# Altium PCB BLDC_PCB_V2.1.PcbDoc
Units mm, origin at the board's own origin, x right, y up, seen from the top; angles counter-clockwise.
Board outline 105 x 68 mm, 2 copper layers (Top Layer, Bottom Layer); 58 components, 33 nets, 138 pads, 16 vias.
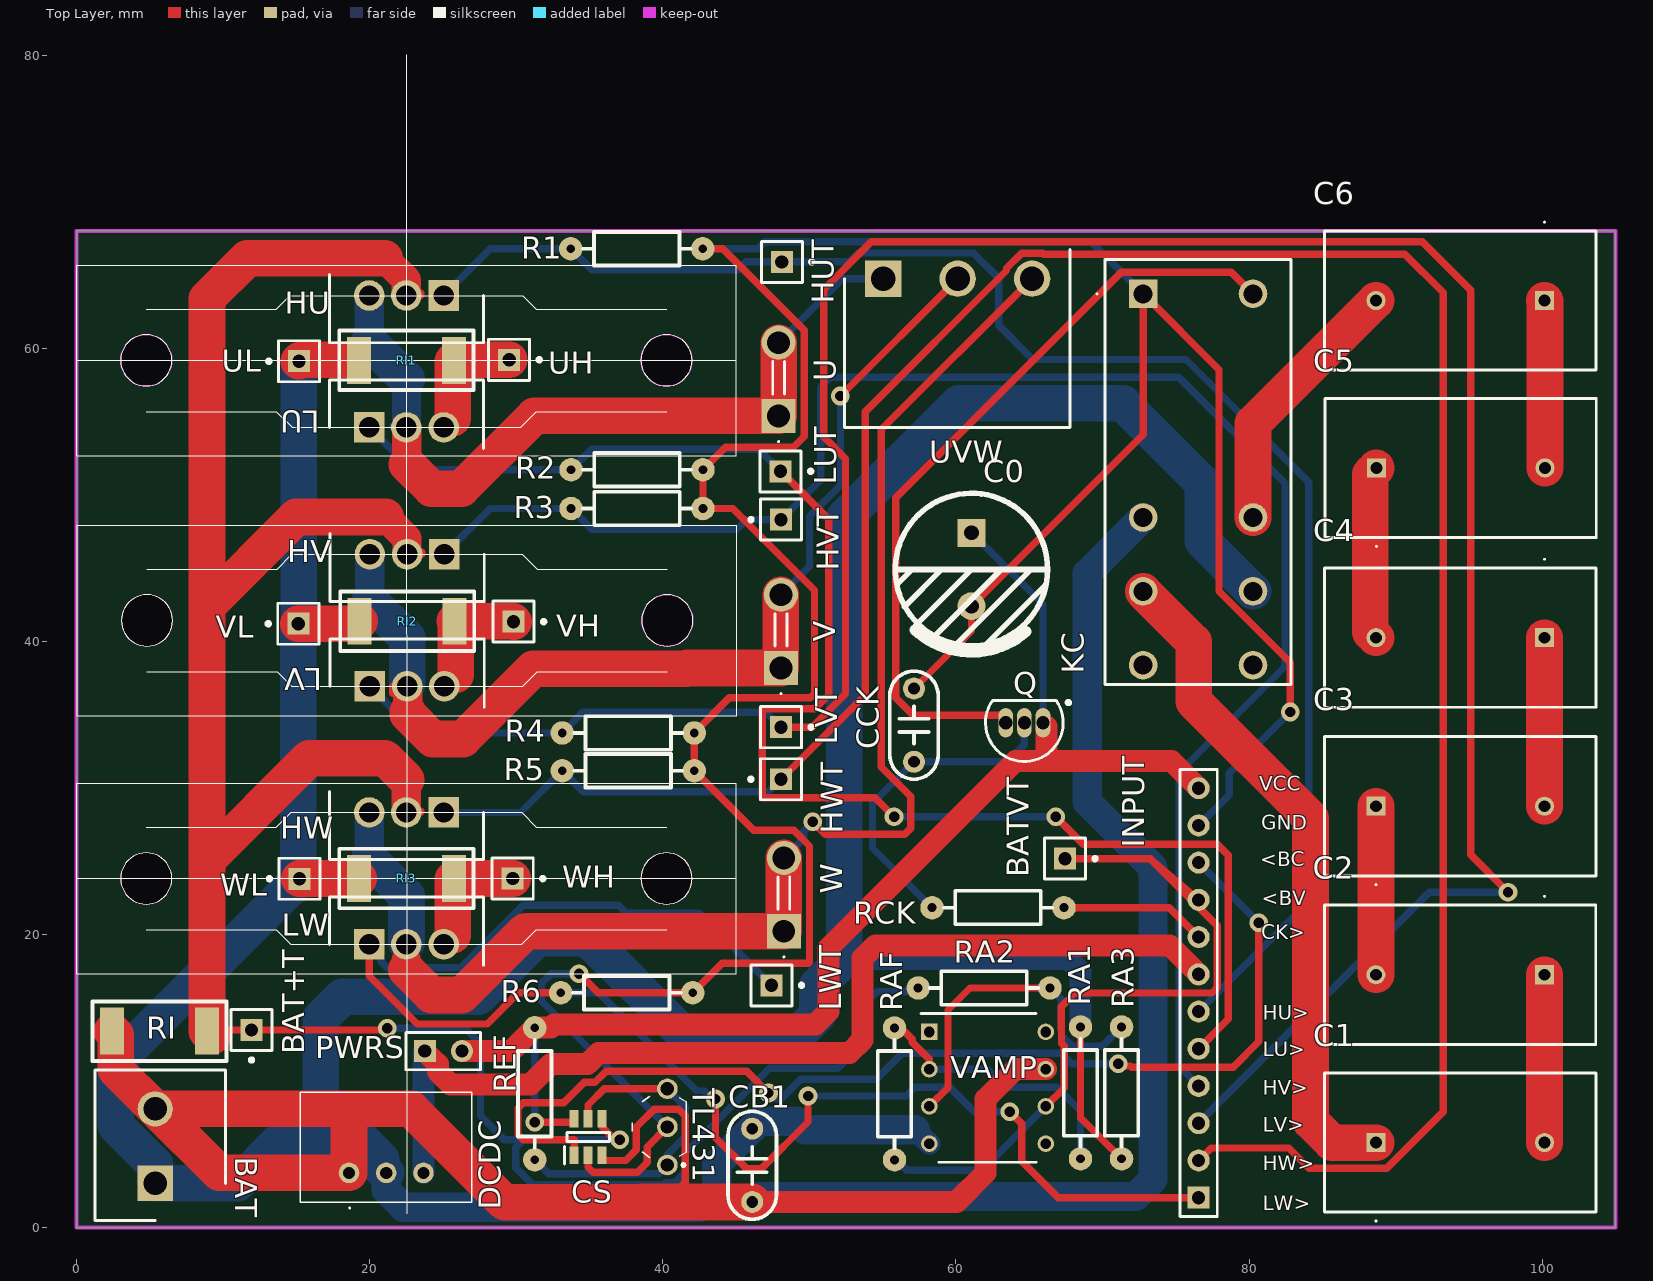
[diagram p0: Top Layer view]
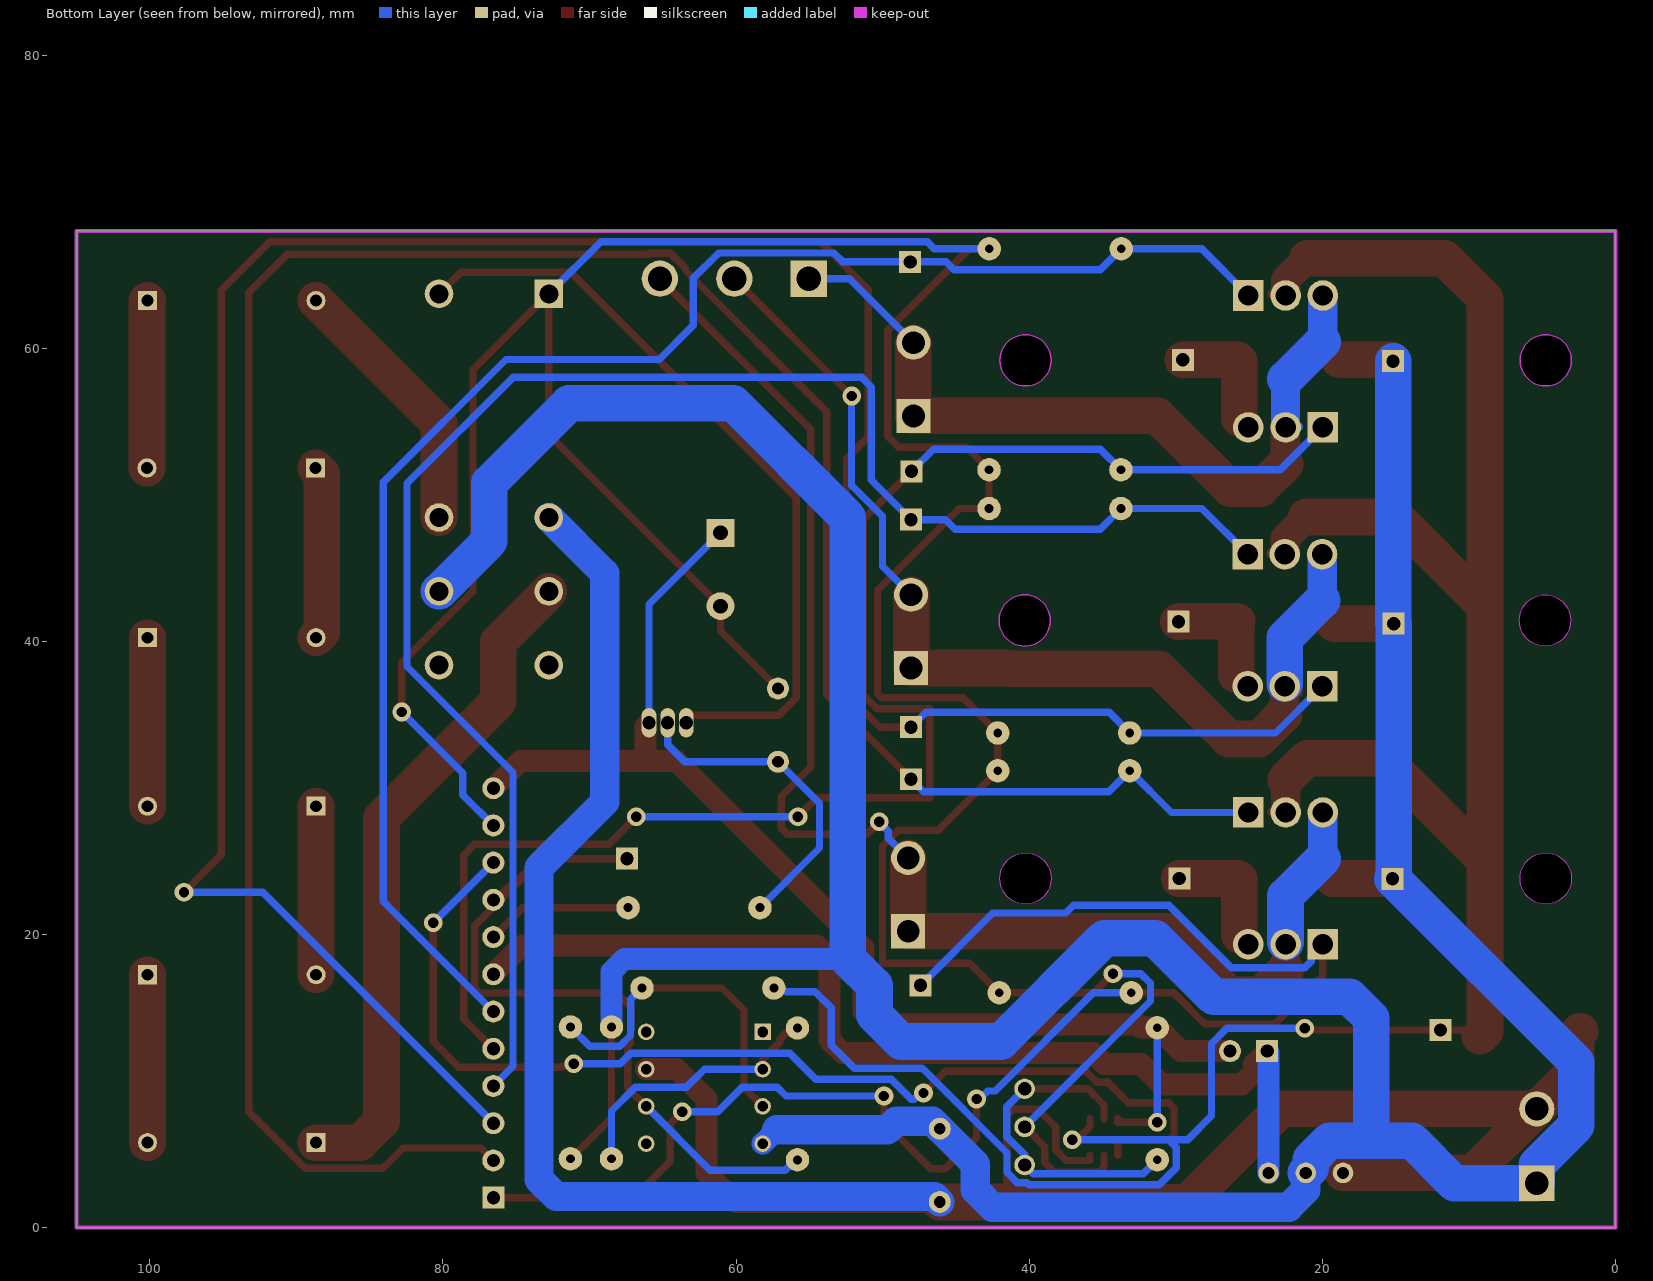
[diagram p1: Bottom Layer view, seen from below]
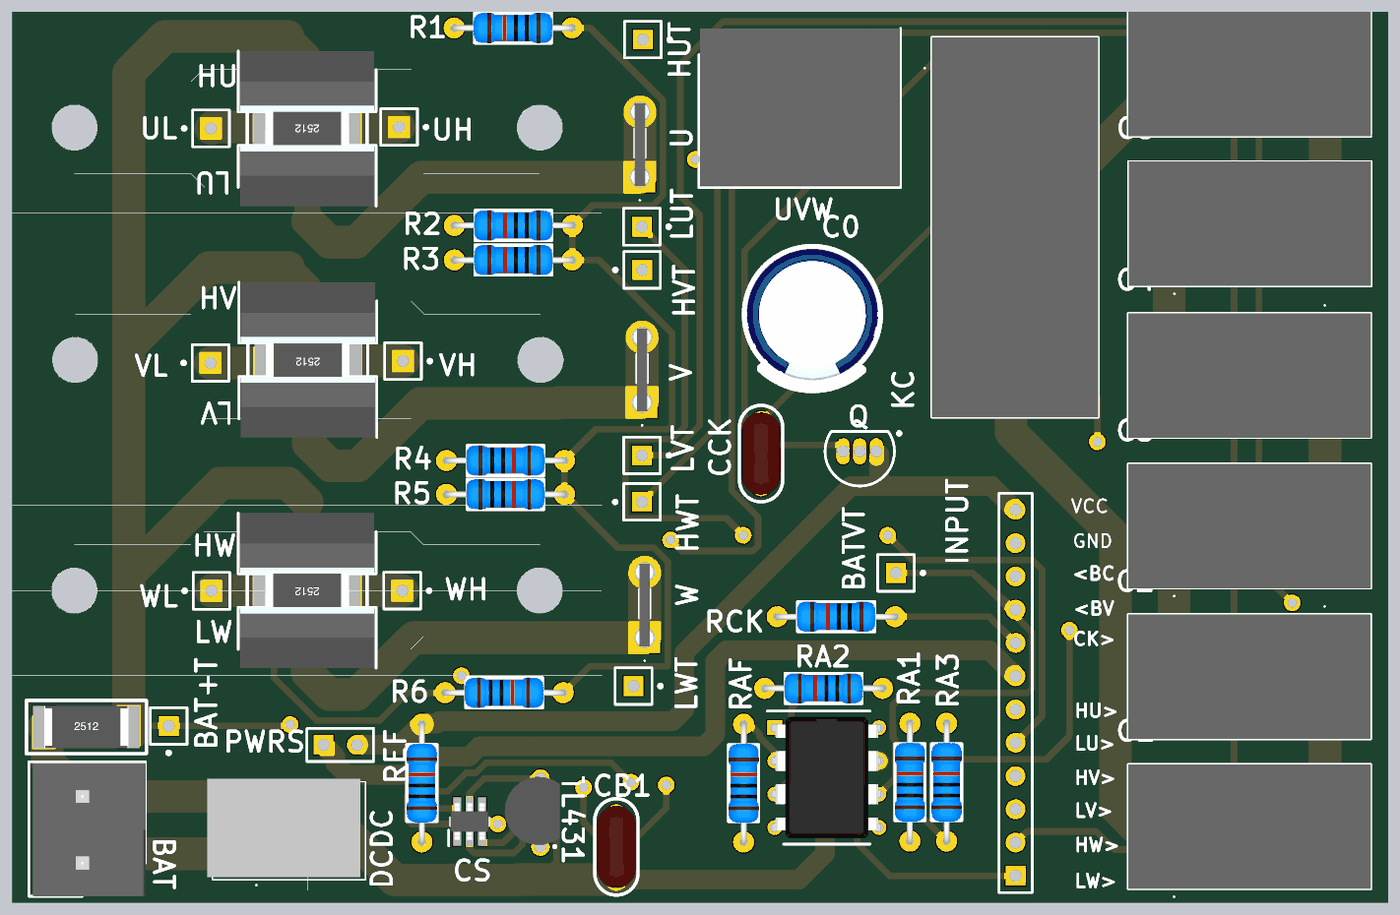
[diagram p2: 3D render of the assembled board from above, using the file's embedded part models]

## Layer stack, top to bottom
Top Solder: solder mask 0.0102, Solder Resist, Dk 3.5
Top Layer: signal copper 0.0356
Dielectric 1: dielectric 0.32, FR-4, Dk 4.8
Bottom Layer: signal copper 0.0356
Bottom Solder: solder mask 0.0102, Solder Resist, Dk 3.5

## Board outline
0,0 0,68 105,68 105,0
cut-out: 4.756,25.569 ccw(c4.756,23.819) 3.006,23.819 ccw(c4.756,23.819) 4.756,22.069 ccw(c4.756,23.819) 6.506,23.819 ccw(c4.756,23.819)
cut-out: 38.506,59.172 cw(c40.256,59.172) 40.256,60.922 cw(c40.256,59.172) 42.006,59.172 cw(c40.256,59.172) 40.256,57.422 cw(c40.256,59.172)
cut-out: 38.556,41.429 cw(c40.306,41.429) 40.306,43.179 cw(c40.306,41.429) 42.056,41.429 cw(c40.306,41.429) 40.306,39.679 cw(c40.306,41.429)
cut-out: 40.256,25.569 ccw(c40.256,23.819) 38.506,23.819 ccw(c40.256,23.819) 40.256,22.069 ccw(c40.256,23.819) 42.006,23.819 ccw(c40.256,23.819)
cut-out: 3.006,59.172 cw(c4.756,59.172) 4.756,60.922 cw(c4.756,59.172) 6.506,59.172 cw(c4.756,59.172) 4.756,57.422 cw(c4.756,59.172)
cut-out: 4.806,43.179 ccw(c4.806,41.429) 3.056,41.429 ccw(c4.806,41.429) 4.806,39.679 ccw(c4.806,41.429) 6.556,41.429 ccw(c4.806,41.429)

## Design rules (kind name [scope] priority, off if disabled: settings)
Clearance [All] p1: gap=0.25 ignorepadtopadclearanceinfootprint=FALSE
PolygonConnect [All] p1: connectstyle=Relief reliefconductorwidth=0.254 reliefentries=4 polygonreliefangle="90 Angle" airgapwidth=0.254
RoutingVias [All] p1: holewidth=0.711 width=1.27 viastyle="Through Hole" minholewidth=0.711 minwidth=1.27 maxholewidth=0.711 maxwidth=1.27
SolderMaskExpansion [All] p1: expansion=0.102 istentingtop=FALSE
Width [All] p1: maxlimit=5 minlimit=0.3 preferedwidth=0.5
30 further rules are at their usual default settings.

## Components (designator, comment, footprint, x,y, rotation, side; value= is the part's Value field where it differs from the comment)
BAT "1757242" SHDR2W100P0X508_1X2_1016X860X1250P 5.37,3.02 r90 top
BAT+T "Test" PIN1 11.94,13.48 r180 top
BATVT "Test" PIN1 67.44,25.17 r270 top
C0 "Cap Pol1" "CAP 5.0*10*12.5" 61.06,44.9 r270 top value=100pF
C1 "SCMR22H155PSBB0" SCMR22H155PSBB0 88.66,5.8 r90 top
C2 "SCMR22H155PSBB0" SCMR22H155PSBB0 100.156,17.25 r270 top
C3 "SCMR22H155PSBB0" SCMR22H155PSBB0 88.66,28.75 r90 top
C4 "SCMR22H155PSBB0" SCMR22H155PSBB0 100.16,40.25 r270 top
C5 "SCMR22H155PSBB0" SCMR22H155PSBB0 88.69,51.83 r90 top
C6 "SCMR22H155PSBB0" SCMR22H155PSBB0 100.16,63.25 r270 top
CB1 "Cap" "CBB 6.3*6.3*5" 46.1,4.25 r90 top value=47UF
CCK "Cap" "CBB 6.3*6.3*5" 57.14,34.28 r90 top value=100pF
CS "INA181A4QDBVRQ1" SOT95P280X145-6N 34.9,6.18 r90 top
DCDC "TSR_1-2450E" TSR12450E 18.59,3.73 r0 top
HU "IRL530" TO254P465X1024X2050-3P 25.046,63.595 r180 top
HUT "Test" PIN1 48.12,65.89 r270 top
HV "IRL530" TO254P465X1024X2050-3P 25.096,45.935 r180 top
HVT "Test" PIN1 48.07,48.3 r90 top
HW "IRL530" TO254P465X1024X2050-3P 25.046,28.325 r180 top
HWT "Test" PIN1 48.06,30.59 r90 top
INPUT "Header 12" HDR1X12 76.56,2.04 r90 top
KC "Relay-DPDT" RT424012613932433 72.77,63.71 r270 top
LU "IRL530" TO254P465X1024X2050-3P 19.966,54.595 r0 top
LUT "Test" PIN1 48.04,51.6 r270 top
LV "IRL530" TO254P465X1024X2050-3P 20.016,36.935 r0 top
LVT "Test" PIN1 48.06,34.14 r270 top
LW "IRL530" TO254P465X1024X2050-3P 19.966,19.325 r0 top
LWT "Test" PIN1 47.41,16.53 r270 top
PWRS "Header 2" HDR1X2 23.76,12.04 r0 top
Q "NPN" TO-226-AA 64.67,34.45 r90 top
R1 "Res2" "RS 1/4W" 38.22,66.78 r180 top value=2.2K
R2 "Res2" "RS 1/4W" 38.24,51.7 r180 top value=2.2K
R3 "Res2" "RS 1/4W" 38.24,49.06 r180 top value=2.2K
R4 "Res2" "RS 1/4W" 37.64,33.75 r0 top value=2.2K
R5 "Res2" "RS 1/4W" 37.64,31.17 r0 top value=2.2K
R6 "Res2" "RS 1/4W" 37.54,16.02 r0 top value=2.2K
RA1 "Res2" "RS 1/4W" 68.5,9.19 r90 top value=100K
RA2 "Res2" "RS 1/4W" 61.92,16.35 r180 top value=100K
RA3 "Res2" "RS 1/4W" 71.3,9.19 r90 top value=10K
RAF "Res2" "RS 1/4W" 55.81,9.12 r90 top value=10K
RCK "Res2" "RS 1/4W" 62.87,21.83 r180 top value=1K
REF "Res2" "RS 1/4W" 31.26,9.13 r90 top value=250
RI "Res2" "R 2512" 5.66,13.4 r0 top value=0.01
RI1 "Res2" "R 2512" 22.506,59.172 r180 top value=0.01ohm
RI2 "Res2" "R 2512" 22.556,41.366 r180 top value=0.01ohm
RI3 "Res2" "R 2512" 22.506,23.822 r180 top value=0.01ohm
TL431 "TL431ACLPR" TL431ACLPR 40.31,4.27 r90 top
U "2376595-2" 23765952 47.9,55.38 r90 top
UH "Socket" PIN1 29.52,59.21 r270 top
UL "Socket" PIN1 15.17,59.11 r90 top
UVW "1785955" SHDRRA3W103P0X508_1X3_1524X1200X872P 55.04,64.74 r180 top
V "2376595-2" 23765952 48.06,38.18 r90 top
VAMP "OPA445AP" DIP794W53P254L959H508Q8N 62.16,9.54 r0 top
VH "Socket" PIN1 29.82,41.34 r270 top
VL "Socket" PIN1 15.13,41.2 r90 top
W "2376595-2" 23765952 48.26,20.22 r90 top
WH "Socket" PIN1 29.76,23.81 r270 top
WL "Socket" PIN1 15.21,23.8 r90 top

## Footprints (in the part's own frame and the unit in brackets; to place one, negate y for a bottom-side part, rotate by r counter-clockwise, add the part's x,y. Pads: shape width x height; smd on the part's side, far side on the other; paste and mask are expansions set on the pad)
23765952 [mm]
  rect 2.325x2.325 hole 1.55: 1(0,0)
  round 2.325 hole 1.55: 1(5,0)
  silkscreen extent -1.8,-0.4 3.7,0.4, body extent -0.67,-0.67 5.68,0.67, height 10.75
"CAP 5.0*10*12.5" [mm] "脚距5mm直径10mm高度12.5mm"
  rect 1.9x1.9 hole 1: 1(-2.5,0)
  round 1.9 hole 1: 2(2.5,0)
  silkscreen extent -5.2,-5.21 5.64,5.2, body extent -5,-5.01 5.01,4.99, height 12.55
"CBB 6.3*6.3*5" [mm] "脚距5mm高6.3mm厚3mm"
  round 1.5 hole 0.8: 1(-2.5,0) 2(2.5,0)
  silkscreen extent -3.68,-1.65 3.68,1.65, body extent -3.15,-1.5 3.15,1.5, height 6.8
DIP794W53P254L959H508Q8N [mm]
  rect 1.13x1.13 hole 0.73: 1(-3.97,3.81)
  round 1.13 hole 0.73: 2(-3.97,1.27) 3(-3.97,-1.27) 4(-3.97,-3.81) 5(3.97,-3.81) 6(3.97,-1.27) 7(3.97,1.27) 8(3.97,3.81)
  silkscreen extent -4.54,-5.08 3.3,5.08, body extent -4.1,-4.64 4.1,4.64, height 4.21
HDR1X2 [mm] "Connector; Header; 2 Position"
  rect 1.5x1.5 hole 0.9: 1(0,0)
  round 1.5 hole 0.9: 2(2.54,0)
  silkscreen extent -1.27,-1.27 3.81,1.27
HDR1X12 [mm] "Connector; Header; 12 Position"
  rect 1.5x1.5 hole 0.9: 1(0,0)
  round 1.5 hole 0.9: 2(2.54,0) 3(5.08,0) 4(7.62,0) 5(10.16,0) 6(12.7,0) 7(15.24,0) 8(17.78,0) 9(20.32,0) 10(22.86,0) 11(25.4,0) 12(27.94,0)
  silkscreen extent -1.27,-1.27 29.21,1.27
PIN1 [mm] "Connector; Plug"
  rect 1.5x1.5 hole 0.9: 1(0,0)
  silkscreen extent -1.4,-1.4 1.4,2.17
"R 2512" [mm] "1W贴片电阻"
  rect 1.65x3.2 smd: 1(-3.24,0) 2(3.24,0)
  silkscreen extent -4.57,-2.03 4.57,2.03, body extent -3.2,-1.6 3.2,1.6, height 0.55
"RS 1/4W" [mm] "直插色环电阻，脚距9mm，直径2.3mm"
  round 1.6 hole 0.6: 1(-4.5,0) 2(4.5,0)
  silkscreen extent -3.68,-1.14 3.68,1.14, body extent -4.72,-1.16 4.73,1.16, height 2.32
RT424012613932433 [mm]
  round 1.95 hole 1.3: 11(20.3,0) 12(15.26,0) 14(25.34,0) 21(20.3,7.5) 22(15.26,7.5) 24(25.34,7.5) A2(0,7.5)
  rect 1.95x1.95 hole 1.3: A1(0,0)
  silkscreen extent -2.35,-3.2 26.65,10.1, body extent -2.35,-2.6 26.65,10.1, height 15.8
SCMR22H155PSBB0 [mm]
  rect 1.3x1.3 hole 0.8: 1(0,0)
  round 1.3 hole 0.8: 2(0,-11.5)
  silkscreen extent -5.4,-15 4.75,3.5, body extent -4.75,-15 4.75,3.5, height 26.1
SHDR2W100P0X508_1X2_1016X860X1250P [mm]
  rect 2.4x2.4 hole 1.6: 1(0,0)
  round 2.4 hole 1.6: 2(5.08,0)
  silkscreen extent -2.54,-4.8 7.72,4.1, body extent -2.54,-4.8 7.62,3.8, height 12.5
SHDRRA3W103P0X508_1X3_1524X1200X872P [mm]
  rect 2.475x2.475 hole 1.65: 1(0,0)
  round 2.475 hole 1.65: 2(-5.08,0) 3(-10.16,0)
  silkscreen extent -12.75,-2 2.64,10.15, body extent -12.7,-2 2.54,10, height 8.72
SOT95P280X145-6N [mm]
  rect 1.2x0.6 smd: 1(-1.25,0.95) 2(-1.25,0) 3(-1.25,-0.95) 4(1.25,-0.95) 5(1.25,0) 6(1.25,0.95)
  silkscreen extent -1.85,-1.45 0.3,1.6, body extent -1.4,-1.45 1.4,1.45, height 1.2
TL431ACLPR [mm]
  round 1.4 hole 0.9: 1(0,0) 2(2.6,0) 3(5.2,0)
  silkscreen extent -0.1,-1.3 4.7,2.4, body extent 0.13,-1.46 5.33,2.73, height 5.35
TO254P465X1024X2050-3P [mm]
  rect 2.085x2.085 hole 1.39: 1(0,0)
  round 2.085 hole 1.39: 2(2.54,0) 3(5.08,0)
  silkscreen extent -2.72,-1.42 7.8,3.22, body extent -2.58,-1.43 7.66,3.22, height 18.77
TO-226-AA [mm] "TO, Flat Index; 3 In-Line, Axial Leads; Body Dia. 4.8mm; Leads 0.55 x 0.51 mm (max)"
  oval 2x1 hole 0.9: 1(0,-1.27) 2(0,0) 3(0,1.27)
  silkscreen extent -2.65,-3.13 1.52,2.65, body extent -2.65,-2.66 1.52,2.66, height 5.33
TSR12450E [mm]
  round 1.4 hole 0.83: 1(0,0) 2(2.54,0) 3(5.08,0)
  silkscreen extent -3.32,-2.45 8.38,5.5, body extent -3.69,-1.78 7.99,5.72, height 9.88

## Part data
BAT: library part OQ025A000000G, "Connector", Manufacturer_Name=Amphenol, Mouser Part Number=523-OQ025A000000G, Datasheet Link=https://media.digikey.com/pdf/Data%20Sheets/Amphenol%20PDFs/OQxx5A00xxxxG.pdf, Height=12.5mm, Manufacturer_Part_Number=OQ025A000000G, Mouser Price/Stock=https://www.mouser.co.uk/ProductDetail/Amphenol-Anytek/OQ025A000000G?qs=T3oQrply3y%2FPbDIhJzFZ1w%3D%3D
BAT+T BATVT HUT HVT HWT LUT LVT LWT U V W: library part Socket, "Socket", LatestRevisionDate=17-Jul-2002, LatestRevisionNote="Re-released for DXP Platform.", Publisher="Altium Limited"
C0: "Polarized Capacitor (Radial)", LatestRevisionDate=17-Jul-2002, LatestRevisionNote="Re-released for DXP Platform.", PackageDescription="Polarized Capacitor (Radial); 2 Leads", PackageReference=RB7.6-15, Published=8-Jun-2000, Publisher="Altium Limited"
C1 C2 C3 C4 C5 C6: "Capacitor Polarised", Manufacturer_Name=AVX, Mouser Part Number=581-SCMR22H155PSBB0, Arrow Part Number=SCMR22H155PSBB0, Arrow Price/Stock=https://www.arrow.com/en/products/scmr22h155psbb0/avx, Datasheet Link=https://datasheets.avx.com/AVX-SCM.pdf, Height=26mm, Manufacturer_Part_Number=SCMR22H155PSBB0, Mouser Price/Stock=https://www.mouser.com/Search/Refine.aspx?Keyword=581-SCMR22H155PSBB0
CB1 CCK: "Capacitor", LatestRevisionDate=17-Jul-2002, LatestRevisionNote="Re-released for DXP Platform.", PackageDescription="Radial Cap, Thru-Hole; 2 Leads; 0.3 in Pin Spacing", PackageReference=RAD-0.3, Published=8-Jun-2000, Publisher="Altium Limited"
CS: "Integrated Circuit", Manufacturer_Name="Texas Instruments", Mouser Part Number=595-INA181A4QDBVRQ1, Arrow Part Number=INA181A4QDBVRQ1, Arrow Price/Stock=https://www.arrow.com/en/products/ina181a4qdbvrq1/texas-instruments?region=nac, Datasheet Link=http://www.ti.com/lit/gpn/INA181-Q1, Height=1.45mm, Manufacturer_Part_Number=INA181A4QDBVRQ1, Mouser Price/Stock=https://www.mouser.co.uk/ProductDetail/Texas-Instruments/INA181A4QDBVRQ1?qs=9r4v7xj2Lnnq9cNkmpf%2FZg%3D%3D
DCDC: "Power Supply", Manufacturer_Name="Traco Power", Manufacturer_Part_Number="TSR 1-2450E", Mouser Part Number=495-TSR1-2450E, Datasheet Link=https://tracopower.com/tsr1e-datasheet/, Height=10.6mm, Mouser Price/Stock=https://www.mouser.co.uk/ProductDetail/TRACO-Power/TSR-1-2450E?qs=vmHwEFxEFR%2FlQnbAtEoeVA%3D%3D
HU HV HW LU LV LW: "MOSFET (N-Channel)", Manufacturer_Name=Vishay, Mouser Part Number=844-IRL530, Datasheet Link=https://mouser.componentsearchengine.com/Datasheets/1/IRL530.pdf, Height=4.65mm, Manufacturer_Part_Number=IRL530, Mouser Price/Stock=https://www.mouser.co.uk/ProductDetail/Vishay-Siliconix/IRL530?qs=ehM%252BESVsXgxZiUd3tW%2FRCg%3D%3D
INPUT: "Header, 12-Pin", LatestRevisionDate=17-Jul-2002, LatestRevisionNote="Re-released for DXP Platform.", Publisher="Altium Limited"
KC: "Dual-Pole Dual-Throw Relay", LatestRevisionDate=17-Jul-2002, LatestRevisionNote="Re-released for DXP Platform.", PackageDescription="Relay; 8 Leads", PackageReference=DIP-P8, Published=24-Mar-1999, Publisher="Altium Limited"
PWRS: "Header, 2-Pin", LatestRevisionDate=17-Jul-2002, LatestRevisionNote="Re-released for DXP Platform.", Publisher="Altium Limited"
Q: "NPN Bipolar Transistor", Code_JEDEC=TO-226-AA, LatestRevisionDate=17-Jul-2002, LatestRevisionNote="Re-released for DXP Platform.", PackageDescription="TO, Flat Index; 3 In-Line, Axial Leads; Body Dia. 4.8mm; Leads 0.55 x 0.51 mm (max)", PackageReference=TO-226-AA, Published=8-Jun-2000, Publisher="Altium Limited"
R1 R2 R3 R4 R5 R6 RA1 RA2 RA3 RAF RCK REF RI RI1 RI2 RI3: "Resistor", LatestRevisionDate=17-Jul-2002, LatestRevisionNote="Re-released for DXP Platform.", PackageDescription="Axial Device, Thru-Hole; 2 Leads; 0.4 in Pin Spacing", PackageReference=AXIAL-0.4, Published=8-Jun-2000, Publisher="Altium Limited"
TL431: "Integrated Circuit", Manufacturer_Name="Texas Instruments", Mouser Part Number=595-TL431ACLPR, Arrow Part Number=TL431ACLPR, Arrow Price/Stock=https://www.arrow.com/en/products/tl431aclpr/texas-instruments?region=nac, Datasheet Link=http://www.ti.com/lit/gpn/tl431, Height=5.34mm, Manufacturer_Part_Number=TL431ACLPR, Mouser Price/Stock=https://www.mouser.co.uk/ProductDetail/Texas-Instruments/TL431ACLPR?qs=0le1rQK8zxqBxlVXkAYIwg%3D%3D
UVW: library part 1759020, "Connector", Manufacturer_Name="Phoenix Contact", Mouser Part Number=651-1759020, Arrow Part Number=1759020, Arrow Price/Stock=https://www.arrow.com/en/products/1759020/phoenix-contact, Datasheet Link=http://www.phoenixcontact.com/de/produkte/1759020/pdf, Height=8.72mm, Manufacturer_Part_Number=1759020, Mouser Price/Stock=https://www.mouser.co.uk/ProductDetail/Phoenix-Contact/1759020?qs=cyzODkzcbwBhDS9bIpwSxQ%3D%3D
VAMP: library part LM101AJG, "High Performance Operational Amplifier", ComponentAvailability=Obsolete, ComponentLink1Description="Manufacturer Link", ComponentLink1URL=http://www.ti.com/, ComponentLink2Description=Datasheet, ComponentLink2URL=http://focus.ti.com/lit/ds/slos061/slos061.pdf, ComponentLink3Description="Discontinuation Notice", ComponentLink3URL=http://focus.ti.com/pdfs/mltry/obsolete.pdf, DatasheetVersion=Sep-1990, LatestRevisionDate=04-Mar-2005, LatestRevisionNote="Stylized 3D Model Added.", PackageDescription="DIP; 8 Leads; Row Spacing 7.62 mm; Pitch 2.54 mm", PackageReference=JG008, PackageVersion=Jan-1995, Published=16-Jan-2001, Publisher="Altium Limited"
UH UL VH VL WH WL: LatestRevisionDate=17-Jul-2002, LatestRevisionNote="Re-released for DXP Platform.", Publisher="Altium Limited"

## Via types
v1: diameter 1.27, hole 0.711, Top Layer to Bottom Layer, 16 vias

## Nets (pads, with @x,y where several pads share a name; then routed paths per layer and width w, separated by ;. In a path a pad name is that pad's centre, name@x,y a point inside that pad or via, vN(x,y) a via of type N, cw(c..) or ccw(c..) an arc to the next point about the centre after c; other vN are vias at no path point)
BAT+: BAT.2 CB1.1 CS.3 DCDC.1 KC.12 RI.1 VAMP.7 | length 189.1
  Top Layer w0.5: CS.3 35.85,4.572 37.465,4.572 38.194,5.301 38.194,6.858 39.413,8.077 41.072,8.077 41.529,7.62 41.529,3.098 40.64,2.209 38.534,2.209
  Top Layer w1.5: CB1.1 60.04,1.75 62.03,3.74 62.03,8.79 64.05,10.81 VAMP.7
  Top Layer w2.5: RI.1 2.67,13.15 2.67,10.8 BAT.2 ; 18.59,8.01 DCDC.1 9.74,3.73 BAT.2 ; CB1.1 38.564,1.75 38.534,1.72 29.21,1.72 22.83,8.1 BAT.2
  Bottom Layer w2: BAT.2 BAT.2@5.478,8.1 ; CB1.1 46.47,2.12 72.268,2.12 73.44,3.292 73.44,24.57 68.96,29.05 68.96,44.64 KC.12
BAT-: BAT.1 CB1.2 DCDC.2 KC.21 RA1.2 RA3.1 RI1.2 RI2.2 RI3.2 UL.1 VAMP.4 VL.1 WL.1 | length 288
  Top Layer w0.5: RI1.2@18.841,59.22 19.266,59.22 RI1.2 ; RA1.2 68.5,7.49 RA3.1
  Top Layer w2.5: VL.1 19.15,41.2 RI2.2 ; UL.1 15.28,59.22 RI1.2@18.841,59.22 ; WL.1 15.232,23.822 RI3.2
  Bottom Layer w1.5: 52.38,18.34 67.621,18.34 68.5,17.461 RA1.2 ; 57.223,6.67 57.438,6.455 57.465,6.455 VAMP.4
  Bottom Layer w2: DCDC.2 21.13,2.562 22.302,1.39 42.503,1.39 43.674,2.562 43.674,4.324 CB1.2 46.609,7.259 49.089,7.259 49.679,6.67 57.223,6.67
  Bottom Layer w2.5: UL.1 15.17,41.24 VL.1 15.13,23.88 WL.1 2.67,11.26 2.67,6.982 5.37,4.282 BAT.1 10.981,3.02 13.891,5.93 16.67,5.93 ; DCDC.2 20.79,4.07 20.79,4.641 19.501,5.93 16.67,5.93 ; KC.21 76.83,46.85 76.83,50.81 71.4,56.24 60.19,56.24 52.38,48.43 52.38,18.34 50.558,16.518 50.558,14.522 48.735,12.7 41.92,12.7 34.88,19.74 31.41,19.74 27.42,15.75 18.134,15.75 16.67,14.286 16.67,5.93
CK: CCK.1 Q.2 RCK.2 | length 22.3
  Bottom Layer w0.5: RCK.2 54.305,25.895 54.305,28.945 CCK.1 63.5,31.78 64.67,32.95 Q.2
CL1: C6.2 KC.22 | length 18.3
  Top Layer w2.5: KC.22 80.27,54.86 C6.2
CS: CS.1 INPUT.10 | length 75.5
  Top Layer w0.5: CS.1 33.95,5.994 30.48,5.994 30.124,6.35 30.124,8.153 30.48,8.509 33.249,8.509 34.65,9.91 35.38,9.91 36.14,10.67 45.729,10.67 v1(47.214,9.185) ; v1(71.065,11.176) 71.212,11.029 71.902,11.029 71.984,10.947 78.918,10.947 80.67,12.7 v1(80.67,20.79)
  Bottom Layer w0.5: v1(47.214,9.185) 47.422,9.185 47.848,8.759 48.049,8.759 49.402,10.112 54.562,10.112 56.337,11.887 67.183,11.887 67.894,11.176 v1(71.065,11.176) ; INPUT.10 v1(80.67,20.79)
CS2: BAT+T.1 CS.4 HU.2 HV.2 HW.2 RA2.2 RI.2 | length 184.7
  Top Layer w0.5: RI.2@9.25,13.05 9.068,13.05 9.068,13.232 9.068,13.48 BAT+T.1 21.1,13.48 v1(21.21,13.59) ; HW.2@22.5,28.539 22.5,28.423 23.495,28.423 23.495,28.325 HW.2 ; HU.2@22.504,63.754 23.495,63.754 23.495,63.595 HU.2 ; HV.2@22.554,46.094 23.546,46.094 23.546,45.935 HV.2 ; CS.4 35.85,6.873 36.728,5.994 v1(37.059,5.994)
  Top Layer w2: 21.02,66.137 22.504,64.653 HU.2@22.504,63.754 ; 21.089,48.48 22.554,47.016 HV.2@22.554,46.094 ; HW.2@22.5,28.539 22.5,30.566
  Top Layer w2.5: RI.2@9.25,13.05 RI.2 8.9,25.05 ; 21.02,66.137 11.657,66.137 8.9,63.38 8.9,42.39 ; 21.089,48.48 14.99,48.48 8.9,42.39 ; 22.5,30.566 21.036,32.03 15.88,32.03 8.9,25.05 ; 8.9,25.05 8.9,42.39
  Bottom Layer w0.5: v1(21.21,13.59) 26.518,13.59 27.559,12.549 27.559,7.62 29.185,5.994 30.48,5.994 ; v1(37.059,5.994) 30.48,5.994 ; RA2.2 57.21,16.14 56.617,16.14 56.577,16.1 54.61,16.1 53.5,14.99 53.5,12.43 51.932,10.862 47.285,10.862 41.51,5.086 41.51,3.773 40.807,3.07 40.171,3.07 40.028,2.927 31.124,2.927 29.96,4.092 29.96,5.474 30.48,5.994
GND: C0.2 CCK.2 CS.2 INPUT.11 KC.A1 R1.1 R2.1 R3.1 R4.2 R5.2 R6.2 TL431.2 | length 223.5
  Top Layer w0.5: v1(34.284,17.317) 34.296,17.317 35.593,16.02 R6.2 44.054,18.034 49.936,18.034 50.013,18.11 50.013,26.035 48.946,27.102 46.208,27.102 R5.2 R4.2 44.53,36.14 50.057,36.14 50.35,36.433 50.35,43.478 44.768,49.06 R3.1 R2.1 44.278,53.238 48.92,53.238 49.657,53.975 49.657,61.214 44.091,66.78 R1.1 ; CS.2 34.9,4.122 35.242,3.779 38.278,3.779 38.944,4.445 38.944,5.504 TL431.2 ; CCK.2 61.06,40.7 C0.2 72.77,54.11 KC.A1 77.953,58.527 77.953,43.409 82.804,38.557 v1(82.804,35.179)
  Bottom Layer w0.5: v1(34.284,17.317) 34.278,17.323 32.385,17.323 31.725,16.662 31.725,15.455 TL431.2 ; R1.1 46.485,66.78 46.965,67.259 69.221,67.259 KC.A1 ; INPUT.11 78.638,29.518 78.638,31.013 v1(82.804,35.179)
NetBATVT_1: BATVT.1 INPUT.9 RAF.1 VAMP.6 | length 51.8
  Top Layer w0.5: VAMP.6 67.386,9.526 67.386,12.395 67.208,12.573 67.208,13.513 67.183,13.538 67.183,15.062 68.123,16.002 77.47,16.002 77.826,16.358 77.826,20.599 73.255,25.17 ; BATVT.1 73.255,25.17 ; INPUT.9 73.255,25.17
  Bottom Layer w0.5: RAF.1 55.953,4.62 56.653,3.92 61.78,3.92 VAMP.6
NetC1_1: C1.1 KC.11 | length 46
  Top Layer w2.5: KC.11 76.22,39.96 76.22,35.91 84.19,27.94 84.19,7.264 85.654,5.8 C1.1
NetC1_2: C1.2 C2.1 | length 11.5
  Top Layer w2.5: C2.1 100.156,5.804 C1.2
NetC2_2: C2.2 C3.1 | length 11.5
  Top Layer w2.5: C2.2 88.656,28.746 C3.1
NetC3_2: C3.2 C4.1 | length 11.5
  Top Layer w2.5: C3.2 C4.1
NetC4_2: C4.2 C5.1 | length 11.9
  Top Layer w2.5: C4.2 88.27,40.64 88.27,51.41 C5.1
NetC5_2: C5.2 C6.1 | length 11.4
  Top Layer w2.5: C6.1 100.19,63.22 C5.2
NetCS_5: CS.5 REF.1 TL431.1 TL431.3 | length 22.7
  Top Layer w0.5: CS.5 34.9,8.37 36,9.47 TL431.3
  Bottom Layer w0.5: REF.1 32.213,3.677 39.717,3.677 TL431.1 40.31,4.978 41.529,6.197 41.529,8.251 TL431.3
NetHU_1: HU.1 HUT.1 INPUT.6 R1.2 | length 109
  Bottom Layer w0.5: HU.1 28.231,66.78 R1.2 35.146,65.354 45.136,65.354 45.672,65.89 HUT.1 52.733,65.89 53.34,66.497 61.189,66.497 62.916,64.77 62.916,61.57 65.253,59.233 75.692,59.233 84.074,50.851 84.074,22.254 INPUT.6
NetHV_1: HV.1 HVT.1 INPUT.4 R3.2 | length 114.9
  Bottom Layer w0.5: HV.1 28.221,49.06 R3.2 35.15,47.65 45.06,47.65 45.709,48.3 HVT.1 50.774,51.004 50.774,57.353 51.435,58.014 75.209,58.014 82.448,50.775 82.448,38.278 75.22,31.049 75.22,11 INPUT.4
NetHW_1: HW.1 HWT.1 INPUT.2 R5.1 | length 172.8
  Top Layer w0.5: HWT.1 53.81,36.34 53.81,55.664 63.449,65.303 63.449,65.446 64.48,66.477 65.92,66.477 65.987,66.41 90.63,66.41 93.24,63.8 93.24,7.905 89.385,4.05 84.091,4.05 82.707,5.434 77.414,5.434 INPUT.2
  Bottom Layer w0.5: HW.1 30.295,28.325 R5.1 34.567,29.743 47.213,29.743 HWT.1
NetINPUT_1: INPUT.1 LW.1 LWT.1 R6.1 | length 107.8
  Top Layer w0.5: LW.1 19.966,17.168 23.241,13.894 28.016,13.894 30.142,16.02 R6.1 ; v1(43.593,8.775) 43.593,6.14 45.72,4.013 46.713,4.013 49.91,7.21 v1(49.91,8.977) ; v1(63.678,7.899) 64.491,7.087 64.491,4.521 66.972,2.04 INPUT.1
  Bottom Layer w0.5: LW.1 20.759,18.532 20.759,18.171 21.196,17.734 26.218,17.734 30.48,21.996 36.982,21.996 37.516,21.463 42.477,21.463 LWT.1 ; R6.1 35.625,16.02 42.323,9.322 42.838,9.322 43.385,8.775 v1(43.593,8.775) ; v1(49.91,8.977) 56.597,8.977 57.2,9.58 59.573,9.58 61.253,7.899 v1(63.678,7.899)
NetINPUT_3: INPUT.3 LV.1 LVT.1 R4.1 | length 180.6
  Top Layer w0.5: LVT.1 50.178,34.14 52.47,36.432 52.47,52.457 50.978,53.95 50.978,64.008 54.229,67.259 91.822,67.259 95.12,63.961 95.12,25.43 v1(97.67,22.88)
  Bottom Layer w0.5: LV.1 23.201,33.75 R4.1 34.544,35.154 47.046,35.154 LVT.1 ; INPUT.3 76.56,7.156 92.284,22.88 v1(97.67,22.88)
NetINPUT_5: INPUT.5 LU.1 LUT.1 R2.2 | length 105.6
  Top Layer w0.5: LUT.1 51.32,48.32 51.32,36.342 50.368,35.39 46.787,35.39 46.787,29.337 54.483,29.337 v1(55.778,28.042) ; v1(66.802,28.042) 68.682,26.162 77.826,26.162 78.588,25.4 78.588,14.228 INPUT.5
  Bottom Layer w0.5: LU.1 22.861,51.7 R2.2 35.151,53.111 46.529,53.111 LUT.1 ; v1(55.778,28.042) v1(66.802,28.042)
NetINPUT_8: INPUT.8 RCK.1 | length 10
  Top Layer w0.5: RCK.1 74.55,21.83 INPUT.8
NetKC_8: KC.A2 Q.3 | length 53.5
  Top Layer w0.5: Q.3 63.4,34.95 57.099,34.95 55.89,36.16 55.89,49.803 71.272,65.185 78.795,65.185 KC.A2
NetLU_3: LU.3 RI1.1 UH.1 | length 8.7
  Top Layer w2: LU.3@25.049,54.598 LU.3@25.67,55.219
  Top Layer w2.5: LU.3@25.67,55.219 25.67,59.096 RI1.1 25.784,59.21 UH.1
NetLV_3: LV.3 RI2.1 VH.1 | length 8.8
  Top Layer w2: LV.3@25.099,36.935 25.099,36.937 25.87,37.709
  Top Layer w2.5: 25.87,37.709 25.87,41.293 RI2.1 29.794,41.366 VH.1
NetLW_3: LW.3 RI3.1 WH.1 | length 8.8
  Top Layer w2: LW.3@25.049,19.325 25.049,19.328 LW.3@25.68,19.959
  Top Layer w2.5: LW.3@25.68,19.959 25.68,23.755 RI3.1 29.748,23.822 WH.1
NetRA1_1: RA1.1 RAF.2 VAMP.2 | length 18.8
  Top Layer w0.5: RAF.2 56.262,13.62 57.023,12.859 57.023,12.649 58.19,11.482 VAMP.2
  Bottom Layer w0.5: VAMP.2 62.15,10.81 63.39,9.57 66.884,9.57 68.5,7.954 RA1.1
NetRA2_1: RA2.1 RA3.2 VAMP.3 | length 23.2
  Top Layer w0.5: VAMP.3 59.461,9.541 59.461,14.851 60.96,16.35 RA2.1
  Bottom Layer w0.5: RA2.1 67.183,15.587 67.183,13.538 67.208,13.513 67.208,13.106 67.945,12.37 69.98,12.37 RA3.2
UO: HU.3 LU.2 U.1 UVW.1 | length 56.5
  Top Layer w2: LU.2 22.54,54.595 22.54,52.08
  Top Layer w2.5: 22.54,52.08 24.204,50.416 26.276,50.416 31.24,55.38 47.9,55.38 U.1@47.9,60.38
  Bottom Layer w0.5: LU.2 21.583,54.595 21.583,54.686 22.509,54.686 LU.2@22.509,54.754 ; U.1@47.9,60.38 52.26,64.74 UVW.1
  Bottom Layer w2: 19.966,60.446 HU.3 ; LU.2@22.509,54.754 22.509,57.903
  Bottom Layer w2.5: 19.966,60.446 22.509,57.903
VCC: C0.1 CS.6 INPUT.12 PWRS.2 Q.1 REF.2 | length 89
  Top Layer w0.5: v1(31.26,7.188) 33.95,7.188 CS.6 ; Q.1 65.94,34.2 Q.1@66.17,34.2
  Top Layer w1.5: PWRS.2 29.643,12.04 31.233,13.63 REF.2 31.279,13.649 32.374,13.649 32.585,13.86 50.411,13.86 51.29,14.739 51.29,19.06 64.05,31.82 66.17,31.82 ; Q.1@66.17,34.2 66.17,31.82 ; INPUT.12 74.72,31.82 66.17,31.82
  Bottom Layer w0.5: v1(31.26,7.188) REF.2 ; C0.1 65.94,42.52 Q.1
VIN: DCDC.3 INPUT.7 PWRS.1 | length 70.4
  Top Layer w1.5: PWRS.1 24.65,11.15 24.65,10.639 25.529,9.76 30.96,9.76 32.36,11.16 34.862,11.16 35.622,11.92 52.751,11.92 53.63,12.799 53.63,18.381 54.509,19.26 74.58,19.26 INPUT.7
  Bottom Layer w1.5: DCDC.3 23.67,11.95 PWRS.1
VO: HV.3 LV.2 UVW.2 V.1 | length 75.7
  Top Layer w0.5: LV.2 21.565,36.935 21.565,36.44 LV.2@22.6,36.44 ; v1(52.121,56.741) UVW.2
  Top Layer w2: 22.6,35.18 LV.2@22.6,36.44
  Top Layer w2.5: 22.6,35.18 22.6,35.03 24.294,33.336 26.366,33.336 31.15,38.12 41.603,38.12 41.663,38.18 48.06,38.18 V.1@48.06,43.18
  Bottom Layer w0.5: LV.2 21.565,36.935 21.565,37.008 22.559,37.008 LV.2@22.559,37.094 ; V.1@48.06,43.18 50.013,45.133 50.013,48.537 52.121,50.646 v1(52.121,56.741)
  Bottom Layer w2: 20.016,42.786 HV.3
  Bottom Layer w2.5: 20.016,42.786 22.559,40.243 LV.2@22.559,37.094
WO: HW.3 LW.2 UVW.3 W.1 | length 98.1
  Top Layer w0.5: 22.506,18.196 LW.2 ; v1(50.241,27.686) 51.087,26.84 56.515,26.84 56.913,27.239 56.913,29.417 54.91,31.42 54.91,54.45 UVW.3
  Top Layer w2: 22.506,17.588 22.506,18.196
  Top Layer w2.5: 22.506,17.588 24.222,15.873 26.293,15.873 30.64,20.22 48.26,20.22 W.1@48.26,25.22
  Bottom Layer w0.5: LW.2 22.506,19.484 LW.2@22.509,19.484 ; W.1@48.26,25.22 49.606,26.566 49.606,27.051 v1(50.241,27.686)
  Bottom Layer w2: 19.966,25.176 HW.3
  Bottom Layer w2.5: 19.966,25.176 22.509,22.633 LW.2@22.509,19.484
pads on no net: KC.14 KC.24 VAMP.1 VAMP.5 VAMP.8

## Keep-outs
Keep-Out Layer:
  circle w0.013: c4.756,59.172 r1.75
  circle w0.013: c4.806,41.429 r1.75
  circle w0.013: c4.756,23.819 r1.75
  circle w0.013: c40.256,23.819 r1.75
  circle w0.013: c40.306,41.429 r1.75
  circle w0.013: c40.256,59.172 r1.75
  lines w0.254: 0,0 0,68 105,68 105,0 0,0

## Silkscreen, mask and mechanical layers (free items; w line width, h text height)
Top Overlay:
  circle w0.013: c4.756,59.172 r1.75
  circle w0.013: c4.806,41.429 r1.75
  circle w0.013: c4.756,23.819 r1.75
  circle w0.013: c40.256,23.819 r1.75
  circle w0.013: c40.306,41.429 r1.75
  circle w0.013: c40.256,59.172 r1.75
  circle w0.006: c22.556,41.429 r0.003
  circle w0.006: c22.506,59.089 r0.003
  circle w0.006: c22.506,23.819 r0.003
  circle w0.006: c22.506,62.672 r0.003
  circle w0.006: c22.556,44.929 r0.003
  circle w0.006: c22.506,27.319 r0.003
  circle w0.006: c22.506,55.672 r0.003
  circle w0.006: c22.556,37.929 r0.003
  circle w0.006: c22.506,20.319 r0.003
  circle w0.006: c22.506,62.672 r0.003
  circle w0.006: c22.506,55.672 r0.003
  circle w0.006: c22.556,44.929 r0.003
  circle w0.006: c22.556,37.929 r0.003
  circle w0.006: c22.506,27.319 r0.003
  circle w0.006: c22.506,20.319 r0.003
  circle w0.013: c4.756,59.172 r1.75
  circle w0.013: c4.806,41.429 r1.75
  circle w0.013: c4.756,23.819 r1.75
  circle w0.013: c40.256,23.819 r1.75
  circle w0.013: c40.306,41.429 r1.75
  circle w0.013: c40.256,59.172 r1.75
  lines w0.013: 0.006,23.819 45.006,23.819 ; 0.006,59.172 45.006,59.172 ; 4.756,20.319 13.631,20.319 14.625,19.325 30.388,19.325 31.381,20.319 40.256,20.319 ; 4.756,23.819 40.256,23.819 ; 4.756,27.319 13.631,27.319 14.638,28.325 30.375,28.325 31.381,27.319 40.256,27.319 ; 4.756,55.672 13.631,55.672 14.709,54.595 30.304,54.595 31.381,55.672 40.256,55.672 ; 4.756,59.172 40.256,59.172 ; 4.756,62.672 13.631,62.672 14.554,63.595 30.459,63.595 31.381,62.672 40.256,62.672 ; 4.806,37.929 13.681,37.929 14.675,36.935 30.438,36.935 31.431,37.929 40.306,37.929 ; 4.806,44.929 13.681,44.929 14.688,45.935 30.425,45.935 31.431,44.929 40.306,44.929 ; 22.506,80.036 22.521,0.936 ; 0.006,17.319 0.006,30.319 45.006,30.319 45.006,17.319 0.006,17.319 ; 0.006,52.672 0.006,65.672 45.006,65.672 45.006,52.672 0.006,52.672 ; 0.056,34.929 0.056,47.929 45.056,47.929 45.056,34.929 0.056,34.929
  text "VCC" at 80.69,29.79 h1
  text "GND" at 80.82,27.13 h1
  text "<BC" at 80.77,24.65 h1
  text "<BV" at 80.85,21.98 h1
  text "CK>" at 80.82,19.66 h1
  text "HU>" at 80.95,14.175 h1
  text "LU>" at 80.95,11.675 h1
  text "HV>" at 80.95,9.05 h1
  text "LV>" at 80.95,6.55 h1
  text "HW>" at 80.95,3.925 h1
  text "LW>" at 80.95,1.175 h1